# Altium PCB Main PCB.PcbDoc
Units mil, origin at the board's own origin, x right, y up, seen from the top; angles counter-clockwise.
Board outline 6000 x 4000 mil, 2 copper layers (Top Layer, Bottom Layer); 45 components, 66 nets, 172 pads, 0 vias.
Unrouted connection lines stored in the file: 140.
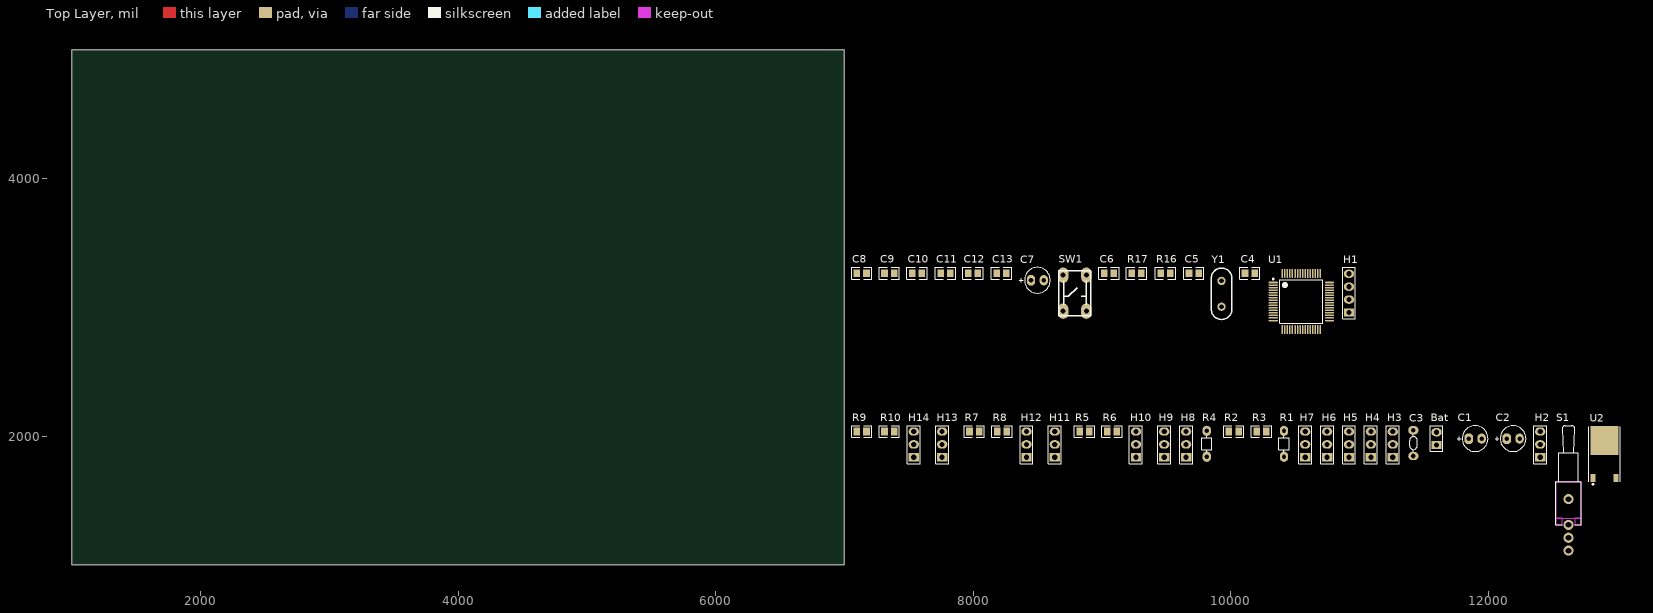
[diagram p0: Top Layer view]
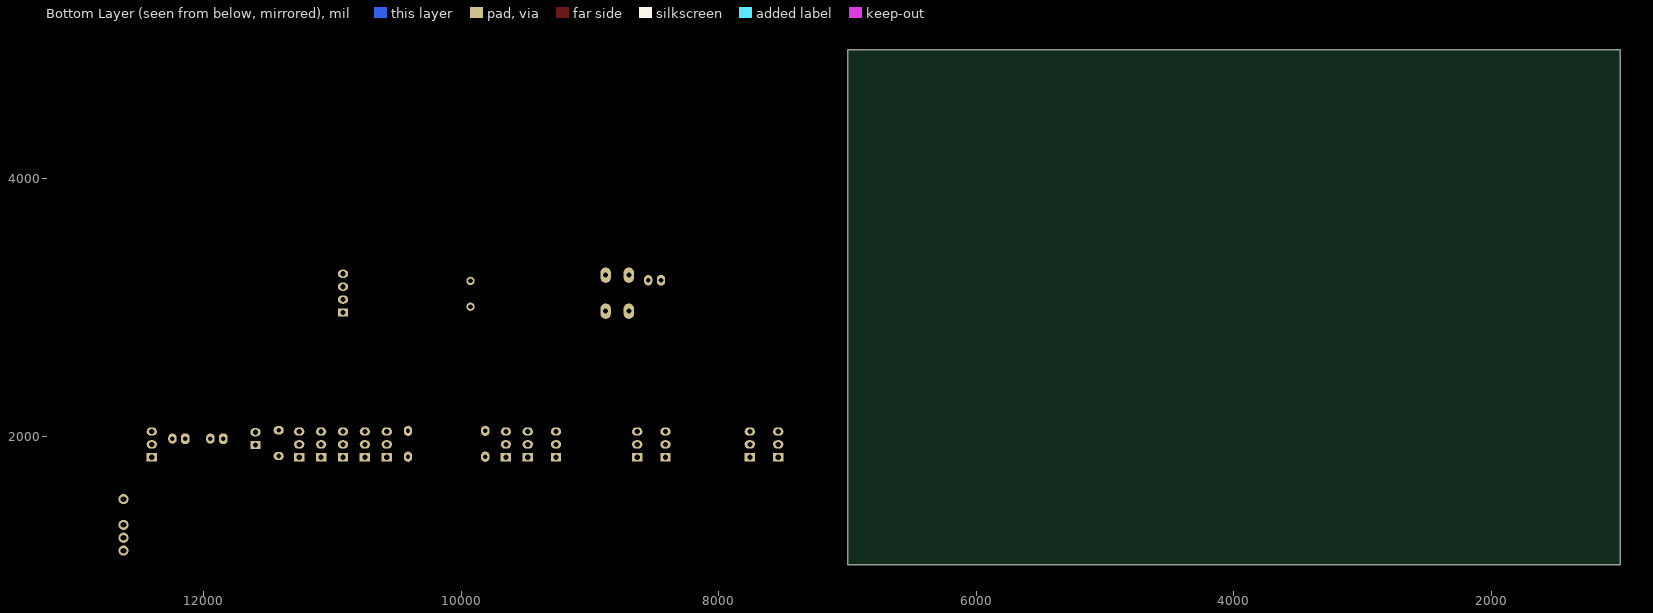
[diagram p1: Bottom Layer view, seen from below]

## Layer stack, top to bottom
Top Solder: solder mask 0.4, Solder Resist, Dk 3.5
Top Layer: signal copper 1.4
Dielectric 1: dielectric 12.6, FR-4, Dk 4.8
Bottom Layer: signal copper 1.4
Bottom Solder: solder mask 0.4, Solder Resist, Dk 3.5

## Board outline
1000,1000 7000,1000 7000,5000 1000,5000

## Design rules (kind name [scope] priority, off if disabled: settings)
Clearance [All] p1: gap=10
PolygonConnect [All] p1: connectstyle=Relief reliefconductorwidth=10 reliefentries=4 polygonreliefangle="90 Angle" airgapwidth=10
RoomDefinition STM32F100RB [InComponentClass('STM32F100RB')] p1: confinementstyle=ConfineIn formatcopy=TRUE lockcomponents=FALSE outline 7045,2770 10980,2770 10980,3420 7045,3420
RoomDefinition "Main Schematic" [InComponentClass('Main Schematic')] p2: confinementstyle=ConfineIn formatcopy=TRUE lockcomponents=FALSE outline 7045,1060 13040,1060 13040,2190 7045,2190
RoutingVias [All] p1: holewidth=28 width=50 viastyle="Through Hole" minholewidth=28 minwidth=50 maxholewidth=28 maxwidth=50
SolderMaskExpansion [All] p1: expansion=4
UnpouredPolygon [All] p1: allowunpoured=FALSE
Width [All] p1: maxlimit=10 minlimit=10 preferedwidth=10
29 further rules are at their usual default settings.

## Classes and differential pairs
component class STM32F100RB: C4 C5 C6 C7 C8 C9 C10 C11 C12 C13 H1 R16 R17 SW1 U1 Y1
component class "Main Schematic": Bat C1 C2 C3 H2 H3 H4 H5 H6 H7 H8 H9 H10 H11 H12 H13 H14 LCD1 R1 R2 R3 R4 R5 R6 R7 R8 R9 R10 S1 U2

## Components (designator, comment, footprint, x,y, rotation, side; value= is the part's Value field where it differs from the comment)
Bat "Header 2" HDR1X2 11600,1930 r90 top
C1 "Cap Pol1" RB.1/.2 11850,1980 r0 top
C2 "Cap Pol1" RB.1/.2 12145,1980 r0 top
C3 "Cap" RAD200_A 11420,1845 r90 top
C4 "Cap" 0805 10150,3265 r0 top
C5 "Cap" 0805 9715,3265 r0 top
C6 "Cap" 0805 9055,3265 r0 top
C7 "Cap Pol1" RB.1/.2 8450,3210 r0 top
C8 "Cap" 0805 7135,3265 r0 top
C9 "Cap" 0805 7350,3265 r0 top
C10 "Cap" 0805 7565,3265 r0 top
C11 "Cap" 0805 7785,3265 r0 top
C12 "Cap" 0805 8000,3265 r0 top
C13 "Cap" 0805 8220,3265 r0 top
H1 "Header 4" HDR1X4 10920,2960 r90 top
H2 "Chan 8" HDR1X3 12405,1835 r90 top
H3 "Leds" HDR1X3 11260,1835 r90 top
H4 "Chan 7" HDR1X3 11090,1835 r90 top
H5 "Chan 6" HDR1X3 10920,1835 r90 top
H6 "Roll Trim" HDR1X3 10750,1835 r90 top
H7 "Chan 5" HDR1X3 10580,1835 r90 top
H8 "Roll Pot" HDR1X3 9655,1835 r90 top
H9 "Pitch Trim" HDR1X3 9485,1835 r90 top
H10 "Pitch Pot" HDR1X3 9265,1835 r90 top
H11 "Yaw Trim" HDR1X3 8635,1835 r90 top
H12 "Yaw Pot" HDR1X3 8415,1835 r90 top
H13 "Throttle" HDR1X3 7760,1835 r90 top
H14 "Throttle Trim" HDR1X3 7540,1835 r90 top
R1 "Res" AXIAL200 10415,1940 r90 top
R2 "Res" 0805 10025,2035 r0 top
R3 "Res" 0805 10240,2035 r0 top
R4 "Res" AXIAL200 9815,1940 r90 top
R5 "Res" 0805 8865,2035 r0 top
R6 "Res" 0805 9080,2035 r0 top
R7 "Res" 0805 8010,2035 r0 top
R8 "Res" 0805 8225,2035 r0 top
R9 "Res" 0805 7135,2035 r0 top
R10 "Res" 0805 7350,2035 r0 top
R16 "Res" 0805 9495,3265 r0 top
R17 "Res" 0805 9270,3265 r0 top
S1 "SW-SPDT" TL36WW15050 12625,1310 r90 top
SW1 "SW_PB" SW_PB 8735,3140 r0 top
U1 "STM32F100RBT6" LQFP64_N 10550,3045 r0 top
U2 "REG1117-3.3" 369A-13 12905,1820 r0 top
Y1 "XTAL" XTAL 9930,3005 r90 top

## Footprints (in the part's own frame and the unit in brackets; to place one, negate y for a bottom-side part, rotate by r counter-clockwise, add the part's x,y. Pads: shape width x height; smd on the part's side, far side on the other; paste and mask are expansions set on the pad)
369A-13 [mm]
  rect 1x1.6 smd: 1(-2.285,-3.7) 3(2.285,-3.7)
  rect 5.5x5.7 smd: 4(0,3.7)
  silkscreen extent -3.09,-5.07 3.09,6.45
0805 [mm]
  rect 1.3x1.5 smd: 1(-0.95,0) 2(0.95,0)
  silkscreen extent -2,-1.15 2,1.15
AXIAL200 [mil]
  oval 80x65 hole 33.47: 1(-100,0) 2(100,0)
  silkscreen extent -65,-40 60,40
HDR1X2 [mil]
  rect 65x80 hole 40: 1(0,0)
  oval 65x80 hole 40: 2(100,0)
  silkscreen extent -50,-50 150,50
HDR1X3 [mil]
  rect 65x80 hole 40: 1(0,0)
  oval 65x80 hole 40: 2(100,0) 3(200,0)
  silkscreen extent -50,-50 245,50
HDR1X4 [mil]
  rect 65x80 hole 40: 1(0,0)
  oval 65x80 hole 40: 2(100,0) 3(200,0) 4(300,0)
  silkscreen extent -50,-50 350,50
LQFP64_N [mm] "Thin QFP, 64-Leads, Body 10x10mm, Pitch 0.5mm, IPC Medium Density"
  oval 1.8x0.3 smd: 1(-5.55,3.75) 2(-5.55,3.25) 3(-5.55,2.75) 4(-5.55,2.25) 5(-5.55,1.75) 6(-5.55,1.25) 7(-5.55,0.75) 8(-5.55,0.25) 9(-5.55,-0.25) 10(-5.55,-0.75) 11(-5.55,-1.25) 12(-5.55,-1.75) 13(-5.55,-2.25) 14(-5.55,-2.75) 15(-5.55,-3.25) 16(-5.55,-3.75) 33(5.55,-3.75) 34(5.55,-3.25) 35(5.55,-2.75) 36(5.55,-2.25) 37(5.55,-1.75) 38(5.55,-1.25) 39(5.55,-0.75) 40(5.55,-0.25) 41(5.55,0.25) 42(5.55,0.75) 43(5.55,1.25) 44(5.55,1.75) 45(5.55,2.25) 46(5.55,2.75) 47(5.55,3.25) 48(5.55,3.75)
  oval 0.3x1.8 smd: 17(-3.75,-5.55) 18(-3.25,-5.55) 19(-2.75,-5.55) 20(-2.25,-5.55) 21(-1.75,-5.55) 22(-1.25,-5.55) 23(-0.75,-5.55) 24(-0.25,-5.55) 25(0.25,-5.55) 26(0.75,-5.55) 27(1.25,-5.55) 28(1.75,-5.55) 29(2.25,-5.55) 30(2.75,-5.55) 31(3.25,-5.55) 32(3.75,-5.55) 49(3.75,5.55) 50(3.25,5.55) 51(2.75,5.55) 52(2.25,5.55) 53(1.75,5.55) 54(1.25,5.55) 55(0.75,5.55) 56(0.25,5.55) 57(-0.25,5.55) 58(-0.75,5.55) 59(-1.25,5.55) 60(-1.75,5.55) 61(-2.25,5.55) 62(-2.75,5.55) 63(-3.25,5.55) 64(-3.75,5.55)
  silkscreen extent -5.67,-4.25 4.25,4.57, body extent -5,-5 5,5, height 1.6
RAD200_A [mil]
  oval 65x80 hole 36: 1(0,0) 2(200,0)
  silkscreen extent 30,-30 170,30
RB.1/.2 [mil]
  oct 65x80 hole 36: 1(0,0)
  oval 65x80 hole 36: 2(100,0)
  silkscreen extent -90,-100 150,100
SW_PB [mil]
  oval 80x120 hole 40: 1(-35,110) 2(145,110) 3(-35,-170) 4(145,-170)
  silkscreen extent -70,-205 180,145
TL36WW15050 [mm] "Switch; 4 Leads"
  round 2 hole 1.1: 1(0,0) 2(-2.54,0) 3(-5.08,0) M(5.08,0)
  Top Layer keep-out region: 0,-1.27 0,-2.54 1.27,-2.54 1.27,-1.27
  Top Layer keep-out region: 0,2.54 0,1.27 1.27,1.27 1.27,2.54
  Top Layer keep-out region: 1.27,2.54 1.27,-2.54 8.509,-2.54 8.509,2.54
  silkscreen extent 0,-2.54 19.56,2.54
XTAL [mil]
  round 65 hole 36: 1(0,0) 2(200,0)
  silkscreen extent -100,-80 300,80

## Part data
Bat: "Header, 2-Pin"
C1 C2 C7: "Polarized Capacitor (Radial)"
C3 C4 C5 C6 C8 C9 C10 C11 C12 C13: "Capacitor"
H1: "Header, 4-Pin"
H2 H3 H4 H5 H6 H7 H8 H9 H10 H11 H12 H13 H14: library part "Header 3", "Header, 3-Pin"
R1 R2 R3 R4 R5 R6 R7 R8 R9 R10 R16 R17: "Resistor"
S1: "SPDT Subminiature Toggle Switch, Right Angle Mounting, Vertical Actuation"
U1: "STM32 ARM-based 32-bit MCU with 128 Kbytes Flash, 64-pin LQFP, Industrial Temperature"
U2: "800mA and 1A Low Dropout Positive Regulator 2.85V, 3.3V, 5V, and Adjustable"

## Nets (pads, with @x,y where several pads share a name; then routed paths per layer and width w, separated by ;. In a path a pad name is that pad's centre, name@x,y a point inside that pad or via, vN(x,y) a via of type N, cw(c..) or ccw(c..) an arc to the next point about the centre after c; other vN are vias at no path point)
GND: Bat.1 C1.2 C2.2 C3.1 C4.1 C5.1 C6.1 C7.2 C8.1 C9.1 C10.1 C11.1 C12.1 C13.1 H1.3 H2.3 H4.3 H5.3 H7.3 H8.3 H10.3 H12.3 H13.3 R2.1 R3.1 R4.2 R5.1 R6.1 R7.1 R8.1 R9.2 R10.1 R16.2 SW1.1 SW1.3 U1.12 U1.18 U1.31 U1.47 U1.63 U2.1
NetBat_2: Bat.2 S1.2
NetC4_2: C4.2 U1.5 Y1.2
NetC5_2: C5.2 U1.6 Y1.1
NetD1_1: 
NetD1_2: 
NetH1_2: H1.2 U1.49
NetH1_4: H1.4 U1.46
NetH2_2: H2.2
NetH3_1: H3.1
NetH3_3: H3.3
NetH4_2: H4.2
NetH5_2: H5.2
NetH6_1: H6.1 R2.2
NetH6_3: H6.3 R3.2
NetH7_2: H7.2
NetH8_2: H8.2
NetH9_1: H9.1 R5.2
NetH9_3: H9.3 R6.2
NetH10_2: H10.2
NetH11_1: H11.1 R7.2
NetH11_3: H11.3 R8.2
NetH12_2: H12.2
NetH13_2: H13.2
NetH14_1: H14.1 R9.1
NetH14_3: H14.3 R10.2
NetH15_1: 
NetH15_2: 
NetH15_3: 
NetH16_1: 
NetH16_2: 
NetH16_3: 
NetH18_1: 
NetH18_2: 
NetH18_3: 
NetH19_1: 
NetH19_2: 
NetH19_3: 
NetH20_1: 
NetH20_2: 
NetH20_3: 
NetH21_1: 
NetH21_2: 
NetH21_3: 
NetH22_1: 
NetH22_2: 
NetH22_3: 
NetH23_1: 
NetH23_2: 
NetH23_3: 
NetH24_1: 
NetH24_2: 
NetH24_3: 
NetH25_1: 
NetH25_2: 
NetLCD1_3: 
NetLCD1_4: 
NetLCD1_5: 
NetLCD1_6: 
NetLCD1_7: 
NetR1_2: R1.2 R4.1
NetR16_1: R16.1 U1.60
NetU1_2: U1.2 U1.3 U1.4 U1.8 U1.9 U1.10 U1.11 U1.14 U1.15 U1.16 U1.17 U1.20 U1.21 U1.22 U1.23 U1.24 U1.25 U1.26 U1.27 U1.28 U1.29 U1.30 U1.33 U1.34 U1.35 U1.36 U1.37 U1.38 U1.39 U1.40 U1.41 U1.42 U1.43 U1.44 U1.45 U1.50 U1.51 U1.52 U1.53 U1.54 U1.55 U1.56 U1.57 U1.58 U1.59 U1.61 U1.62
RESET: C6.2 H1.1 R17.2 SW1.2 SW1.4 U1.7
VBAT: C1.1 R1.1 S1.3 U2.3
VCC: C2.1 C3.2 C7.1 C8.2 C9.2 C10.2 C11.2 C12.2 C13.2 H2.1 H3.2 H4.1 H5.1 H6.2 H7.1 H8.1 H9.2 H10.1 H11.2 H12.1 H13.1 H14.2 R17.1 U1.1 U1.13 U1.19 U1.32 U1.48 U1.64 U2.4
pads on no net: S1.1 S1.M